# Altium PCB Jetson Nano Power-one.PcbDoc
Units mm, origin at the board's own origin, x right, y up, seen from the top; angles counter-clockwise.
Board outline 80.9 x 32 mm, 2 copper layers (Top Layer, Bottom Layer); 6 components, 5 nets, 17 pads, 0 vias.
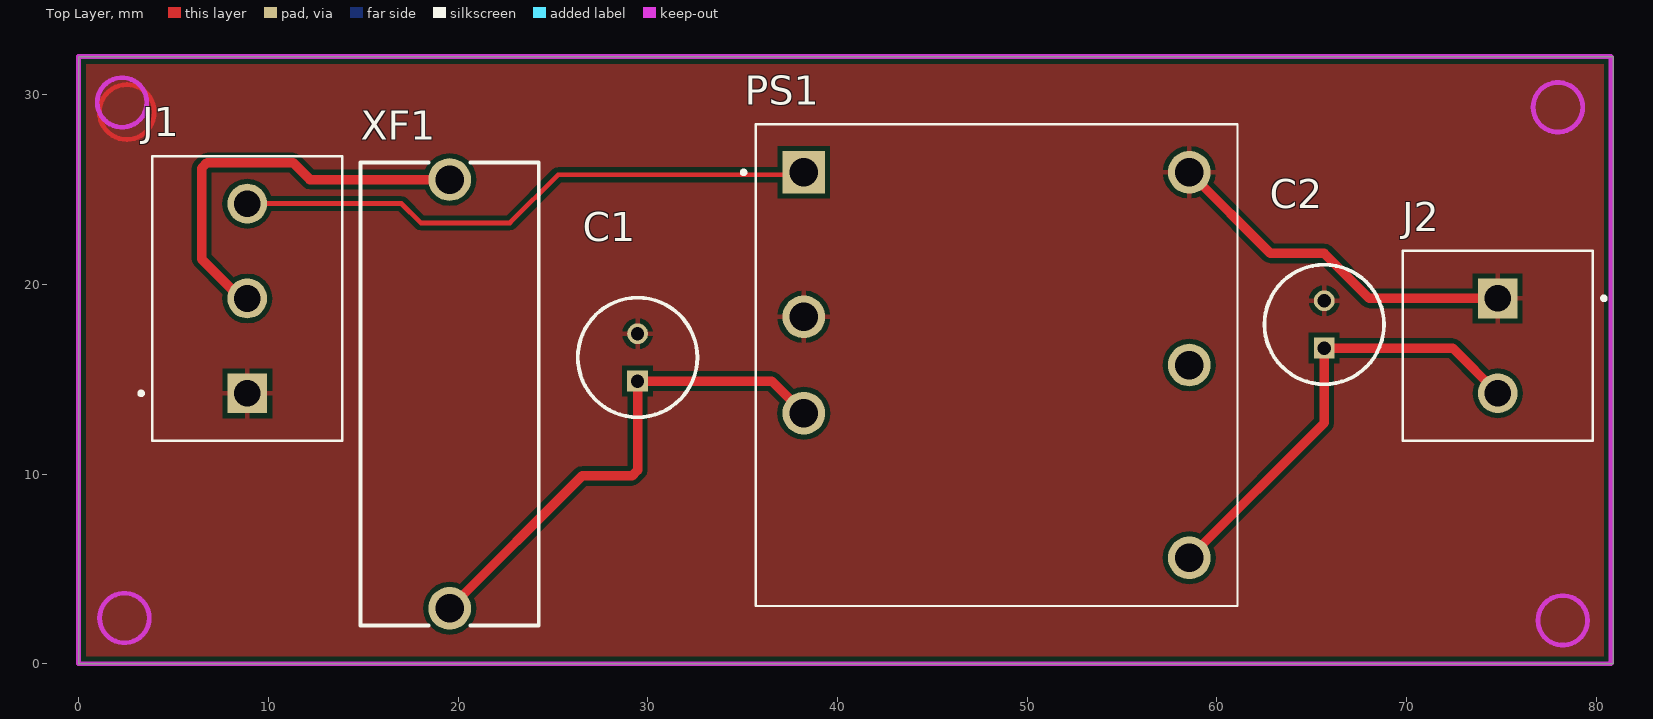
[diagram p0: Top Layer view]
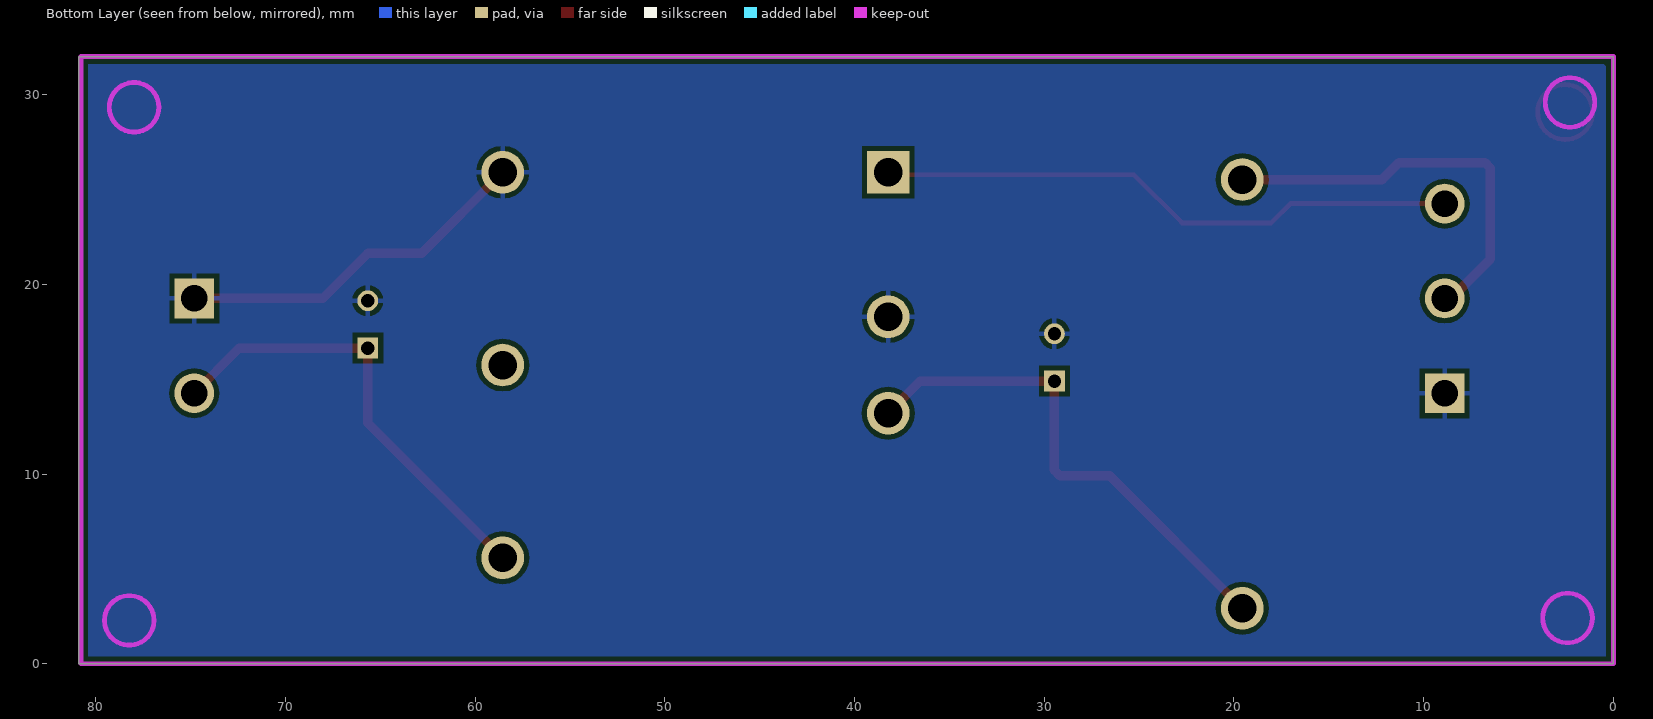
[diagram p1: Bottom Layer view, seen from below]
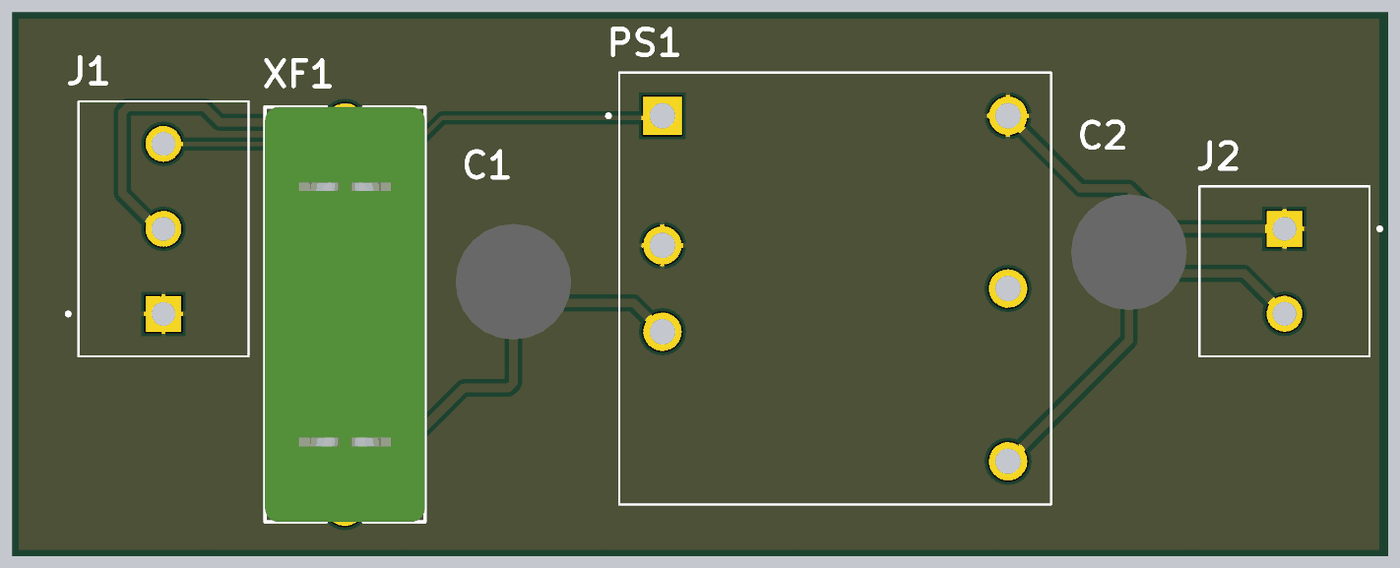
[diagram p2: 3D render of the assembled board from above, using the file's embedded part models]

## Layer stack, top to bottom
Top Solder: solder mask 0.0102, Solder Resist, Dk 3.5
Top Layer: signal copper 0.0356
Dielectric 1: dielectric 0.32, FR-4, Dk 4.8
Bottom Layer: signal copper 0.0356
Bottom Solder: solder mask 0.0102, Solder Resist, Dk 3.5

## Board outline
0,0 80.899,0 80.899,32.004 0,32.004

## Design rules (kind name [scope] priority, off if disabled: settings)
Clearance [All] p1: gap=0.254 ignorepadtopadclearanceinfootprint=FALSE except(0: Arc-Hole Track-Hole SMDPad-Hole THPad-Hole Via-Hole Fill-Hole Poly-Hole Region-Hole Text-Hole)
PolygonConnect [All] p1: connectstyle=Relief reliefconductorwidth=0.254 reliefentries=4 polygonreliefangle="90 Angle" airgapwidth=0.254
RoutingVias [All] p1: holewidth=0.711 width=1.27 viastyle="Through Hole" minholewidth=0.711 minwidth=1.27 maxholewidth=0.711 maxwidth=1.27
SolderMaskExpansion [All] p1: expansion=0.102 istentingtop=FALSE
Width [All] p1: maxlimit=0.5 minlimit=0.254 preferedwidth=0.5 bottomlayer_maxwidth=0.254 bottomlayer_prefwidth=0.254 minimp=50.000000 maximp=50.000000 favimp=50.000000
30 further rules are at their usual default settings.

## Components (designator, comment, footprint, x,y, rotation, side; value= is the part's Value field where it differs from the comment)
C1 "ESK107M016AE3AA" CAPPRD250W50D630H1250 29.464,14.899 r90 top
C2 "ESK107M016AE3AA" CAPPRD250W50D630H1250 65.659,16.637 r90 top
J1 "282856-3" *TE_282856-3 8.89,19.257 r90 top
J2 "282856-2" *TE_282856-2 74.803,16.764 r270 top
PS1 "PDQE20-Q24-S5-D" *CONV_PDQE20-Q24-S5-D 48.387,15.748 r0 top
XF1 "696108003002" 696108003002 19.558,14.224 r270 top

## Footprints (in the part's own frame and the unit in brackets; to place one, negate y for a bottom-side part, rotate by r counter-clockwise, add the part's x,y. Pads: shape width x height; smd on the part's side, far side on the other; paste and mask are expansions set on the pad)
696108003002 [mm] "FUSEHOLDER BLOCKS - PCB - CLIP COVER - THT"
  round 2.25 hole 1.5: 1(-11.3,0) 2(11.3,0)
  silkscreen extent -12.2,-4.7 12.2,4.7, body extent -12.2,-4.7 12.2,4.7, height 11.55
*CONV_PDQE20-Q24-S5-D [mm]
  rect 2.25x2.25 hole 1.5: 1(-10.16,10.16)
  round 2.25 hole 1.5: 2(-10.16,2.54) 3(-10.16,-2.54) 4(10.16,-10.16) 5(10.16,0) 6(10.16,10.16)
  silkscreen extent -13.43,-12.7 12.7,12.7
*TE_282856-2 [mm]
  rect 2.1x2.1 hole 1.4: 1(-2.5,0)
  round 2.1 hole 1.4: 2(2.5,0)
  silkscreen extent -5,-5 5,5.7
*TE_282856-3 [mm]
  rect 2.1x2.1 hole 1.4: 1(-5,0)
  round 2.1 hole 1.4: 2(0,0) 3(5,0)
  silkscreen extent -7.5,-5 7.5,5.7
CAPPRD250W50D630H1250 [mm]
  rect 1.1x1.1 hole 0.7: 1(0,0)
  round 1.1 hole 0.7: 2(2.5,0)
  silkscreen extent -1.9,-3.15 4.4,3.15, body extent -2.15,-3.4 4.65,3.4, height 12.5

## Part data
C1 C2: "Capacitor Polarised", Manufacturer_Name=Kemet, Datasheet Link=https://api.kemet.com/component-edge/download/datasheet/ESK107M016AE3AA.pdf, Height=12.5mm, Manufacturer_Part_Number=ESK107M016AE3AA
J1: "TERMI-BLOK PCB MOUNT 3P", Package=None, Digi-Key_Part_Number=A98356-ND, Digi-Key_Purchase_URL=https://www.digikey.com/product-detail/en/te-connectivity-amp-connectors/282856-3/A98356-ND/1131587?utm_source=snapeda&utm_medium=aggregator&utm_campaign=symbol, EU_RoHS_Compliance="Compliant with Exemptions", MF="TE Connectivity", MP=282856-3, SnapEDA_Link=https://www.snapeda.com/parts/282856-3/TE%20Connectivity%20AMP%20Connectors/view-part/2383467/?ref=snap, TE_purchase_URL=https://www.te.com/usa-en/product-282856-3.html?te_bu=Cor&te_type=disp&te_campaign=seda_glo_cor-seda-global-disp-prtnr-fy19-seda-model-bom-cta_sma-317_1&elqCampaignId=32493
J2: "TERMI-BLOK PCB MOUNT 2P", Package=None, Availability=Unavailable, EU_RoHS_Compliance="Compliant with Exemptions", MF="TE Connectivity", MP=282856-2, Price=None, SnapEDA_Link=https://www.snapeda.com/parts/282856-2/TE%20Connectivity%20AMP%20Connectors/view-part/1809079/?ref=snap, TE_purchase_URL=https://www.te.com/usa-en/product-282856-2.html?te_bu=Cor&te_type=disp&te_campaign=seda_glo_cor-seda-global-disp-prtnr-fy19-seda-model-bom-cta_sma-317_1&elqCampaignId=32493
PS1: "20 W, 4:1 Input Range, Single/Dual Regulated Output, DIP, 1500 Vdc Isolation, Dc-Dc Converter", Package="DIP-6 CUI Inc.", CUI_purchase_URL=https://www.cui.com/product/dc-dc-converters/isolated/pdqe20-d-series?utm_source=snapeda.com&utm_medium=referral&utm_campaign=snapedaBOM, Digi-Key_Part_Number=102-6267-ND, Digi-Key_Purchase_URL=https://www.digikey.com/product-detail/en/cui-inc/PDQE20-Q24-S5-D/102-6267-ND/10230156?utm_source=snapeda&utm_medium=aggregator&utm_campaign=symbol, MF="CUI Inc.", MP=PDQE20-Q24-S5-D, SnapEDA_Link=https://www.snapeda.com/parts/PDQE20-Q24-S5-D/CUI/view-part/3740268/?ref=snap
XF1: library part CMP-1502-00237-1, "WR-FSH Fuse Holder Blocks Fuse Holder Blocks Clip Cover for PCB", Manufacturer="Wurth Elektronik", Operating Temperature=-30to120degC, Datasheet URL=https://katalog.we-online.de/em/datasheet/696108003002.pdf, Fuse Size=5x20mm, Manufacturer URL=http://www.we-online.de, Mounting Technology=THT, Package Reference=696108003002, Packaging=Box, Part Number=696108003002, Publisher=WurthElektronik

## Nets (pads, with @x,y where several pads share a name; then routed paths per layer and width w, separated by ;. In a path a pad name is that pad's centre, name@x,y a point inside that pad or via, vN(x,y) a via of type N, cw(c..) or ccw(c..) an arc to the next point about the centre after c; other vN are vias at no path point)
GND: C1.2 C2.2 J1.1 J2.1 PS1.2 PS1.6 | length 28.1
  Top Layer w0.254: 3.988,29.083 ccw(c2.54,29.083) 3.988,29.083
  Top Layer w0.5: PS1.6 62.818,21.637 65.659,21.637 68.032,19.264 J2.1
NetC1_1: C1.1 PS1.3 XF1.2 | length 27.1
  Top Layer w0.5: XF1.2 26.54,9.906 29.171,9.906 29.464,10.199 C1.1 36.536,14.899 PS1.3
NetC2_1: C2.1 J2.2 PS1.4 | length 24.1
  Top Layer w0.5: PS1.4 65.659,12.7 C2.1 72.43,16.637 J2.2
NetJ1_2: J1.2 XF1.1 | length 22.1
  Top Layer w0.254: J1.2 J1.2@8.89,19.685
  Top Layer w0.5: J1.2 8.556,19.257 6.477,21.336 6.477,26.123 6.77,26.416 11.303,26.416 12.192,25.527 19.555,25.527 XF1.1
NetJ1_3: J1.3 PS1.1 | length 30.9
  Top Layer w0.254: J1.3 17.018,24.257 18.034,23.241 22.733,23.241 25.273,25.781 38.1,25.781 PS1.1
pads on no net: PS1.5

## Polygon pours and split planes (outlines as drawn)
GND on Top Layer "GND top" (solid, pour order 0): 0,32.004 80.899,32.004 80.772,31.877 80.772,0 0,0
GND on Bottom Layer "GND bottom" (solid, pour order 1): 0.381,31.496 0.508,31.623 80.391,31.623 80.391,0.508 80.518,0.381 0.381,0.381

## Keep-outs
Keep-Out Layer:
  circle w0.254: c78.232,2.286 r1.308
  circle w0.254: c77.978,29.337 r1.308
  circle w0.254: c2.413,2.413 r1.308
  circle w0.254: c2.286,29.591 r1.308
  lines w0.254: 0,0 80.772,0 80.772,32.004 0,32.004 0,0